# EAGLE board issue24827_brenner57e (EAGLE 4.15)
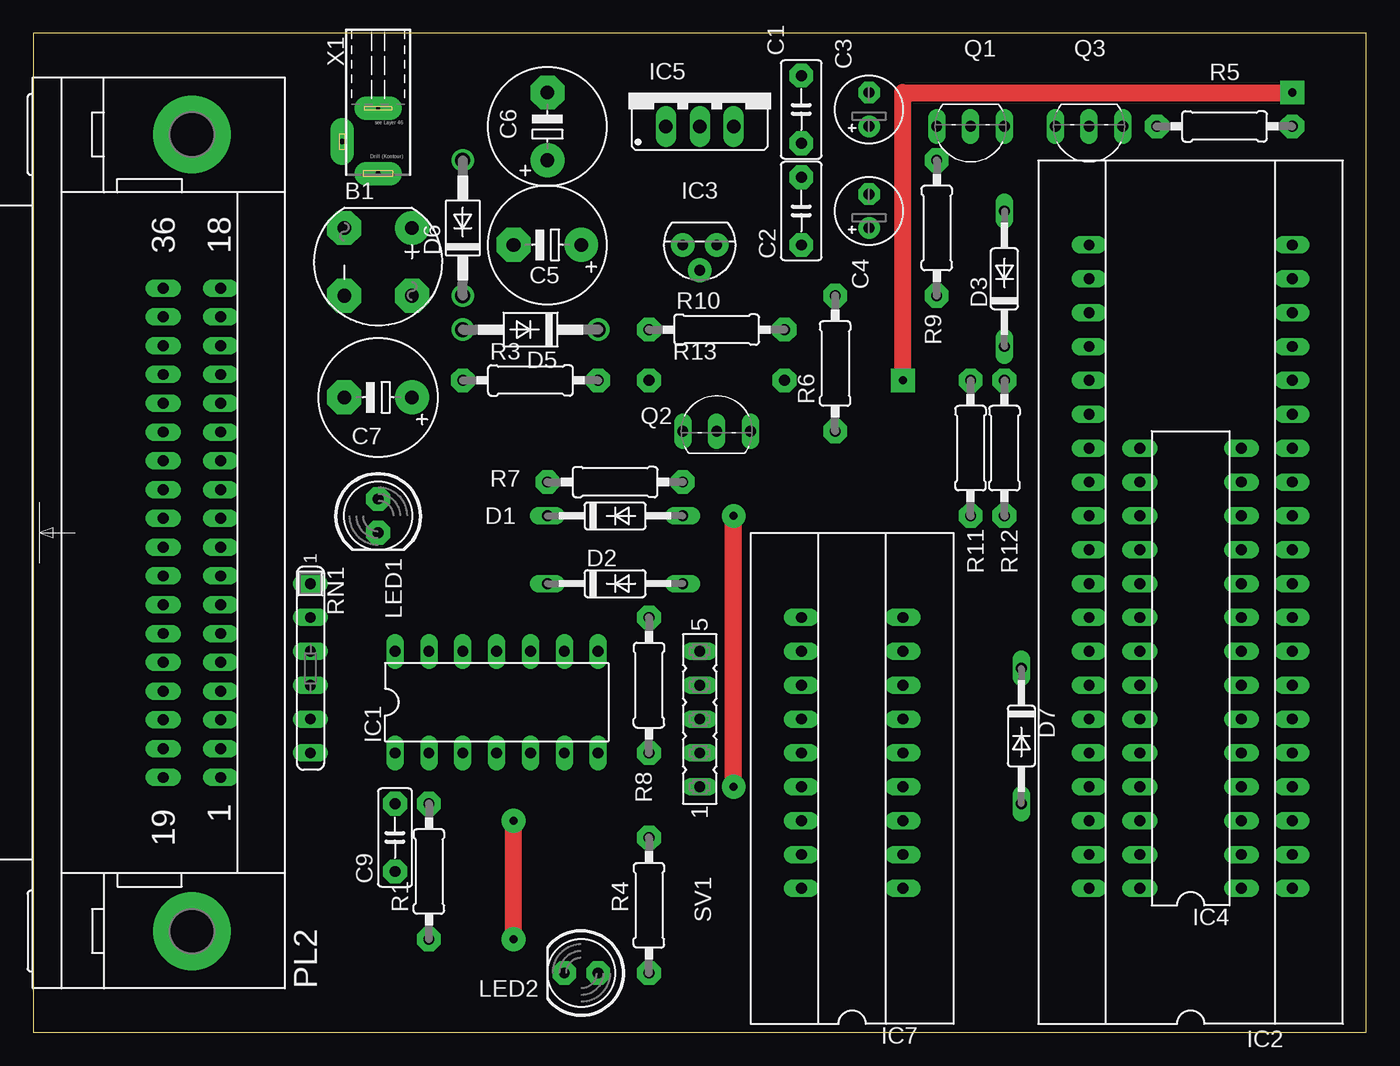
[diagram p0: board, top side]
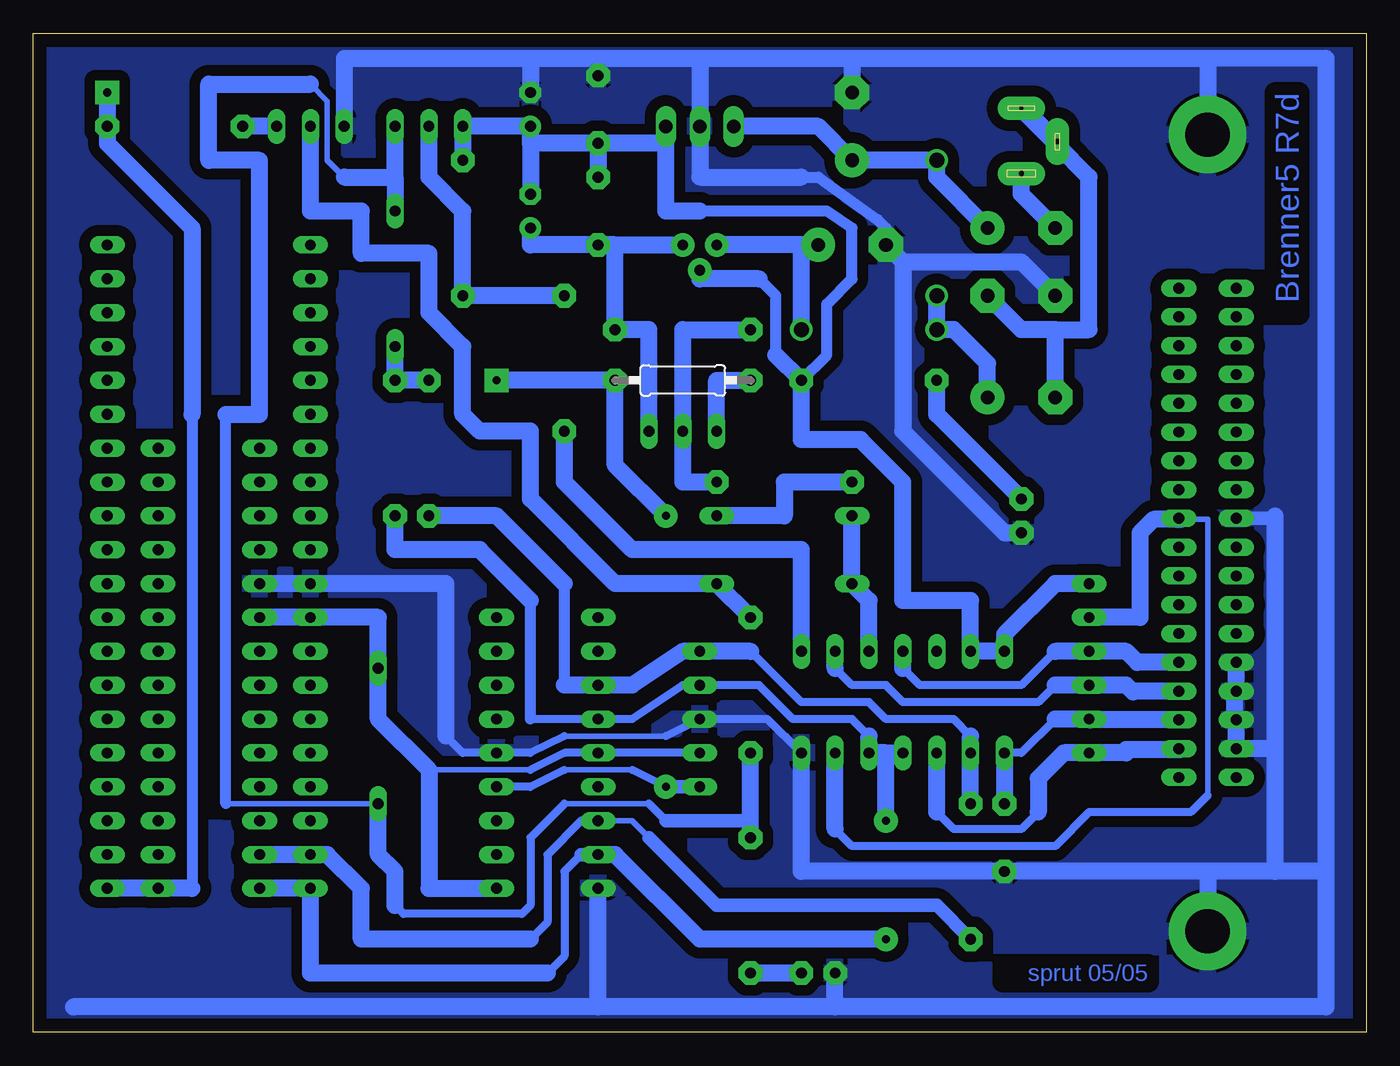
[diagram p1: board, bottom side, seen from below]

Size 100 x 74.92 mm. Coordinates in mm from the lower left corner, seen from the top.
Outline: 0,0 100,0 100,74.92 0,74.92 0,0
Copper layers (1*16): Top 0.035mm / dielectric 1.5mm / Bottom 0.035mm
Design rules "leiterplatte mit löchern": minimum track width 10mil, minimum drill 8mil, track to track 8mil, track to pad 8mil, pad to pad 8mil, via to via 8mil, smd to smd 8mil, copper to edge 40mil, drill to drill 8mil, minimum pad ring 10mil, minimum via ring 10mil, stop-mask expansion 4mil, vias tented up to drill 0mil, thermal gap 10mil
Net classes: 1 GND: width 1.016 mm

## Footprints (pad centres in the part's own frame; a part is rotated, then mirrored left to right if it is on the bottom)
RB1A = drill 1.016 pad 2.54 round: + -2.54,2.54 | drill 1.016 pad 2.54 octagon: - 2.54,-2.54; AC1 2.54,2.54; AC2 -2.54,-2.54
C050-030X075 = drill 0.813 pad 1.778 octagon: 1 -2.54,0; 2 2.54,0
E2,5-5 = drill 0.813 pad 1.6 round: + -1.27,0 | drill 0.813 pad 1.6 octagon: - 1.27,0
E5-8,5 = drill 1.016 pad 2.54 round: + -2.54,0 | drill 1.016 pad 2.54 octagon: - 2.54,0
C050-025X075 = drill 0.813 pad 1.778 octagon: 1 -2.54,0; 2 2.54,0
DO35-10 = drill 0.813 long: A 5.08,0; C -5.08,0
DO41-10 = drill 1.118 round: A 5.08,0; C -5.08,0
DIL14 = drill 0.813 long: 1 -7.62,-3.81; 2 -5.08,-3.81; 3 -2.54,-3.81; 4 0,-3.81; 5 2.54,-3.81; 6 5.08,-3.81; 7 7.62,-3.81; 8 7.62,3.81; 9 5.08,3.81; 10 2.54,3.81; 11 0,3.81; 12 -2.54,3.81; 13 -5.08,3.81; 14 -7.62,3.81
TEXTOOL40 = drill 0.813 long: 1 -24.13,-7.62; 2 -21.59,-7.62; 3 -19.05,-7.62; 4 -16.51,-7.62; 5 -13.97,-7.62; 6 -11.43,-7.62; 7 -8.89,-7.62; 8 -6.35,-7.62; 9 -3.81,-7.62; 10 -1.27,-7.62; 11 1.27,-7.62; 12 3.81,-7.62; 13 6.35,-7.62; 14 8.89,-7.62; 15 11.43,-7.62; 16 13.97,-7.62; 17 16.51,-7.62; 18 19.05,-7.62; 19 21.59,-7.62; 20 24.13,-7.62; 21 24.13,7.62; 22 21.59,7.62; 23 19.05,7.62; 24 16.51,7.62; 25 13.97,7.62; 26 11.43,7.62; 27 8.89,7.62; 28 6.35,7.62; 29 3.81,7.62; 30 1.27,7.62; 31 -1.27,7.62; 32 -3.81,7.62; 33 -6.35,7.62; 34 -8.89,7.62; 35 -11.43,7.62; 36 -13.97,7.62; 37 -16.51,7.62; 38 -19.05,7.62; 39 -21.59,7.62; 40 -24.13,7.62
TO92 = drill 0.813 pad 1.778 round: 1 -1.27,0; 2 0,1.905; 3 1.27,0
DIL28-3 = drill 0.813 long: 1 -16.51,-3.81; 2 -13.97,-3.81; 3 -11.43,-3.81; 4 -8.89,-3.81; 5 -6.35,-3.81; 6 -3.81,-3.81; 7 -1.27,-3.81; 8 1.27,-3.81; 9 3.81,-3.81; 10 6.35,-3.81; 11 8.89,-3.81; 12 11.43,-3.81; 13 13.97,-3.81; 14 16.51,-3.81; 15 16.51,3.81; 16 13.97,3.81; 17 11.43,3.81; 18 8.89,3.81; 19 6.35,3.81; 20 3.81,3.81; 21 1.27,3.81; 22 -1.27,3.81; 23 -3.81,3.81; 24 -6.35,3.81; 25 -8.89,3.81; 26 -11.43,3.81; 27 -13.97,3.81; 28 -16.51,3.81
78XXS = drill 1.016 long: GND 0,-2.54; IN -2.54,-2.54; OUT 2.54,-2.54
TEXTOOL18 = drill 0.813 long: 1 -10.16,-3.81; 2 -7.62,-3.81; 3 -5.08,-3.81; 4 -2.54,-3.81; 5 0,-3.81; 6 2.54,-3.81; 7 5.08,-3.81; 8 7.62,-3.81; 9 10.16,-3.81; 10 10.16,3.81; 11 7.62,3.81; 12 5.08,3.81; 13 2.54,3.81; 14 0,3.81; 15 -2.54,3.81; 16 -5.08,3.81; 17 -7.62,3.81; 18 -10.16,3.81
LED5MM = drill 0.813 pad 1.778 octagon: A -1.27,0; K 1.27,0
36HP = drill 0.813 long: 1 -18.352,-2.159; 2 -16.192,-2.159; 3 -14.034,-2.159; 4 -11.874,-2.159; 5 -9.716,-2.159; 6 -7.556,-2.159; 7 -5.397,-2.159; 8 -3.239,-2.159; 9 -1.079,-2.159; 10 1.079,-2.159; 11 3.239,-2.159; 12 5.397,-2.159; 13 7.556,-2.159; 14 9.716,-2.159; 15 11.874,-2.159; 16 14.034,-2.159; 17 16.192,-2.159; 18 18.352,-2.159; 19 -18.352,2.159; 20 -16.192,2.159; 21 -14.034,2.159; 22 -11.874,2.159; 23 -9.716,2.159; 24 -7.556,2.159; 25 -5.397,2.159; 26 -3.239,2.159; 27 -1.079,2.159; 28 1.079,2.159; 29 3.239,2.159; 30 5.397,2.159; 31 7.556,2.159; 32 9.716,2.159; 33 11.874,2.159; 34 14.034,2.159; 35 16.192,2.159; 36 18.352,2.159 | drill 3.302 pad 5.842 round: G -29.87,0; G1 29.87,0
TO92-EBC = drill 0.813 long: B 0,-1.27; C -2.54,-1.27; E 2.54,-1.27
0207/10 = drill 0.813 pad 1.778 octagon: 1 -5.08,0; 2 5.08,0
SIL6 = drill 0.813 long: 1 -6.35,0; 2 -3.81,0; 3 -1.27,0; 4 1.27,0; 5 3.81,0; 6 6.35,0
FE05-1 = drill 0.813 long: 1 -5.08,0; 2 -2.54,0; 3 0,0; 4 2.54,0; 5 5.08,0
733989-5 = drill 0.4 pad 1.778 long: 1 0,5.82; 3 2.7,3.42 | drill 0.3 pad 1.778 long: 2 0,0.92

## Placement (x,y rotation side)
B1  B80C...  [RB1A]  25.87,57.78 270 top
C1  100nF  [C050-030X075]  57.62,69.21 90 top
C2  100nF  [C050-030X075]  57.62,61.59 90 top
C3  2,2µF 25V  [E2,5-5]  62.7,69.21 90 top
C4  2,2µF 25V  [E2,5-5]  62.7,61.59 90 top
C5  22µF 35V  [E5-8,5]  38.57,59.05 180 top
C6  100µF 35V  [E5-8,5]  38.57,67.94 90 top
C7  100µF 35V  [E5-8,5]  25.87,47.62 180 top
C9  1nF  [C050-025X075]  27.14,14.6 90 top
D1  1N4148  [DO35-10]  43.65,38.73 0 top
D2  BAT43  [DO35-10]  43.65,33.65 0 top
D3  1N4148  [DO35-10]  72.86,56.51 90 top
D5  1N4004  [DO41-10]  37.3,52.7 180 top
D6  1N4004  [DO41-10]  32.22,60.32 90 top
D7  BAT43  [DO35-10]  74.13,22.22 270 top
IC1  7407N  [DIL14]  34.76,24.76 0 top
IC2  40-pin  [TEXTOOL40]  86.83,34.92 90 top
IC3  7808L  [TO92]  50,59.05 180 top
IC4  28-pin  [DIL28-3]  86.83,27.3 90 top
IC5  7805  [78XXS]  50,70.48 0 top
IC7  18-pin  [TEXTOOL18]  61.43,20.95 90 top
LED1  grün  [LED5MM]  25.87,38.73 270 top
LED2  gelb  [LED5MM]  41.11,4.44 180 top
PL2  Druckerport  [36HP]  11.9,37.46 90 top
Q1  BC328-25  [TO92-EBC]  70.32,66.67 180 top
Q2  BC328-25  [TO92-EBC]  51.27,46.35 0 top
Q3  BC338-25  [TO92-EBC]  79.21,66.67 180 top
R1  3k3  [0207/10]  29.68,12.06 90 top
R3  1k  [0207/10]  37.3,48.89 0 top
R4  1k  [0207/10]  46.19,9.52 90 top
R5  100  [0207/10]  89.37,67.94 0 top
R6  10k  [0207/10]  60.16,50.16 90 top
R7  10k  [0207/10]  43.65,41.27 0 top
R8  10k  [0207/10]  46.19,26.03 270 top
R9  10k  [0207/10]  67.78,60.32 90 top
R10  10k  [0207/10]  51.27,52.7 0 top
R11  220  [0207/10]  70.32,43.81 90 top
R12  1k2  [0207/10]  72.86,43.81 90 top
R13  100  [0207/10]  51.27,48.89 0 bottom
RN1  SIL6-5 1k2  [SIL6]  20.79,27.3 270 top
SV1  ICSP  [FE05-1]  50,23.49 90 top
X1  9VAC  [733989-5]  25.87,70.23 180 top

## Library data of the parts
B1 = rectifier
C1-C7 C9 R1 R3-R13 = rcl
D1 D3 D5 D6 = diode
D2 D7 IC2 IC7 = sprut
IC1 = 74xx-eu
IC3 = linear
IC4 = ic-package
IC5 = v-reg
LED1 LED2 = led
PL2 = con-amp-champ
Q1 Q2 = transistor-pnp
Q3 = transistor-npn
RN1 = resistor-sil
SV1 = con-lsta
X1 = con-conrad

## Nets
5VGESCH: D3.A D7.A Q1.C R4.2 R8.2
13V: C2.1 C4.+ IC3.1 Q2.E R10.2
DATA_IN: IC1.3 PL2.2 RN1.6
DATA_OUT: IC1.6 PL2.10 RN1.2
GND [GND]: B1.- C1.2 C3.- C5.- C6.- C9.1 IC1.7 IC2.31 IC4.19 IC5.GND IC7.5 IC7.18 LED1.K LED2.K PL2.20 PL2.21 PL2.22 PL2.23 PL2.28 PL2.G PL2.G1 Q3.E SV1.3
ICSP_CLK: IC1.2 IC7.12 R1.2 R11.1 SV1.5
ICSP_DATA: IC1.4 IC1.5 IC2.40 IC4.28 IC7.13 IC7.17 R12.1 SV1.4
MCLR: IC2.1 IC4.1 IC7.4 R5.2 R13.1 SV1.1
N$1: IC1.9 PL2.4 RN1.4
N$2: IC1.11 PL2.5 RN1.3
N$3: C9.2 IC1.1 PL2.3 RN1.5
N$4: D3.C R11.2 R12.2
N$5: IC2.39 IC4.27 IC7.16 R1.1
N$6: IC1.8 R6.1
N$7: B1.+ C6.+ D6.A IC5.IN
N$8: Q2.C R13.2
N$9: B1.AC1 C7.- X1.2 X1.3
N$10: C5.+ D5.C IC3.3
N$11: C7.+ D5.A D6.C
N$12: Q3.C R5.1
N$13: B1.AC2 X1.1
N$14: D1.C D2.C IC1.10
N$15: LED1.A R3.1
N$16: LED2.A R4.1
N$17: Q1.B R6.2 R9.1
N$18: D1.A R7.1
N$19: Q2.B R7.2 R10.1
N$21: D2.A Q3.B R8.1
VCC [GND]: C1.1 C2.2 C3.+ C4.- IC1.13 IC1.14 IC3.2 IC5.OUT Q1.E R3.2 R9.2 RN1.1
VDD: D7.C IC2.32 IC4.20 IC7.1 IC7.14 SV1.2

## Tracks (layer width: path | path; a pad name or v marks a point on that pad's centre or on a via)
5VGESCH
  Bottom 0.406: 53.81,17.14 60.16,17.14 | 76.67,64.13 77.94,65.4 77.94,69.84 79.21,71.12 | D7.A 85.56,17.14
  Bottom 0.61: 72.86,9.52 72.22,8.88 63.34,8.88 62.7,9.52 62.7,14.6 60.16,17.14 | R4.2 46.19,15.87 | 52.54,15.87 53.81,17.14
  Bottom 0.813: 85.56,17.14 85.56,46.35
  Bottom 1.016: 46.19,15.87 52.54,15.87
  Bottom 1.27: R4.2 R8.2 | 72.86,9.52 72.86,12.06 74.13,13.33 D7.A | 72.86,64.13 Q1.C | 72.86,64.13 D3.A | 76.67,64.13 72.86,64.13 | 79.21,71.12 86.83,71.12 86.83,65.4 83.02,65.4 83.02,46.35 85.56,46.35
13V
  Bottom 1.27: 56.35,59.05 IC3.1 | 56.35,59.05 C2.1 62.7,59.05 C4.+ | 56.35,59.05 R10.2 53.81,52.7 Q2.E
DATA_IN
  Bottom 0.406: 18,20.95 17.87,21.08 17.74,21.2
  Bottom 0.61: 24.6,16.5 25.87,15.23 30.95,15.23 32.22,16.5 | 18,21.2 17.87,21.08 | 13.93,21.2 14,21.27 PL2.2
  Bottom 1.27: 18,20.95 RN1.6 22.7,20.95 24.6,19.04 24.6,16.5 | 32.22,16.5 IC1.3 | 13.93,21.2 18,21.2
DATA_OUT
  Bottom 0.406: 11.9,17.77 11.9,38.48 13.93,38.48
  Bottom 0.61: 11.9,17.77 13.17,16.5 20.79,16.5 23.33,13.96 38.57,13.96 39.84,15.23
  Bottom 1.27: 39.84,15.23 IC1.6 | RN1.2 16.98,31.11 16.98,37.46 15.96,38.48 14.19,38.48 14.12,38.54 PL2.10 14,38.54 13.93,38.48
GND
  Bottom 0.406: 52.54,22.22 60.16,22.22 | 6.82,38.73 7.01,38.54
  Bottom 0.61: IC1.7 44.92,23.49 SV1.3 52.54,22.22 | 60.16,22.22 62.7,20.95 IC7.5 67.78,20.95 69.05,22.22 | PL2.28 9.55,38.54 9.36,38.73 9.17,38.54 | 9.87,25.52 9.81,25.59 | 9.81,25.59 PL2.22 | 9.81,25.59 9.74,25.65 | 9.87,23.49 9.81,23.43 PL2.21 | 9.81,21.27 9.87,21.2 | PL2.20 9.81,21.27 | 9.81,21.27 9.74,21.33 | 6.82,21.2 6.88,21.27 | 3.01,73.02 3.04,73.05
  Bottom 0.813: C5.- 36.03,60.32 36.66,60.96 41.11,64.13 42.38,64.13
  Bottom 1.016: 7.01,38.54 9.17,38.54
  Bottom 1.27: 69.05,22.22 69.05,33.65 IC2.31 IC4.19 | 6.82,12.06 11.9,12.06 | 11.9,12.06 C9.1 42.38,12.06 IC1.7 | 6.82,12.06 6.82,21.2 6.82,38.73 | 39.84,1.9 3.01,1.9 3.01,12.06 | 39.84,1.9 57.62,1.9 | 57.62,1.9 96.99,1.9 | 3.01,12.06 3.01,73.02 | 3.01,12.06 6.82,12.06 | 57.62,1.9 IC7.18 | 39.84,1.9 LED2.K | 11.9,12.06 PL2.G | 9.74,25.65 PL2.23 | 9.87,23.49 9.87,25.52 | 9.74,21.33 PL2.21 | 6.88,21.27 PL2.20 | 38.57,73.02 C6.- | 38.57,73.02 50,73.02 | 50,73.02 IC5.GND 50,64.13 42.38,64.13 | B1.- 25.87,57.78 34.76,57.78 | C5.- 34.76,57.78 | 3.04,73.05 11.9,73.02 | 11.9,73.02 PL2.G1 | 57.62,73.02 C1.2 | 62.7,73.02 C3.- | 57.62,73.02 62.7,73.02 | 50,73.02 57.62,73.02 | Q3.E 76.67,73.02 62.7,73.02 | 11.9,73.02 38.57,73.02 | LED1.K 27.14,37.46 34.76,45.08 34.76,57.78
  pour Bottom (isolate 0.813): -0.8,-0.64 100.8,-0.64 100.8,75.56 -0.8,75.56
ICSP_CLK
  Bottom 0.61: 46.19,28.57 42.38,24.76 37.3,24.76 36.03,23.49 30.95,23.49 29.68,22.22
  Bottom 0.813: 60.16,26.03 60.16,33.65
  Bottom 1.27: 46.19,28.57 SV1.5 51.27,28.57 55.08,26.03 IC7.12 60.16,26.03 | 29.68,22.22 IC1.2 R1.2 | 60.16,33.65 65.24,38.73 R11.1
ICSP_DATA  (via drill 0.61 pad 1.78)
  Top 1.27: v36.03,6.98 v36.03,15.87
  Bottom 0.61: 37.3,22.22 38.57,23.49 43.02,23.49 45.55,26.03 SV1.4 51.27,26.03 55.08,23.49 IC7.13 62.7,23.49 | 58.89,13.33 60.16,12.06 60.16,5.71 61.43,4.44
  Bottom 0.813: 62.7,23.49 62.7,32.38
  Bottom 1.016: IC7.17 58.89,13.33
  Bottom 1.27: 36.03,20.95 IC1.4 | 36.03,20.95 IC1.5 37.3,22.22 | 62.7,32.38 66.51,36.19 72.86,36.19 R12.1 | IC4.28 IC2.40 79.21,4.44 61.43,4.44 | IC7.17 56.35,13.33 50,6.98 v36.03,6.98 | v36.03,15.87 36.03,20.95
MCLR  (via drill 0.61 pad 1.78)
  Top 1.27: v52.54,18.41 v52.54,38.73 | v65.24,48.89 65.24,70.48 v94.45,70.48
  Bottom 0.406: 55.08,19.68 60.16,19.68
  Bottom 0.61: v52.54,18.41 55.08,19.68 | 60.16,19.68 62.7,18.41 IC7.4
  Bottom 0.813: 88.1,46.35 88.1,10.79
  Bottom 1.016: SV1.1 v52.54,18.41
  Bottom 1.27: IC2.1 IC4.1 88.1,10.79 | 88.1,46.35 88.1,60.32 94.45,66.67 R5.2 v94.45,70.48 | v52.54,38.73 56.35,42.54 R13.1 v65.24,48.89
N$1
  Bottom 0.61: 23.33,26.03 24.6,24.76 34.76,24.76 36.03,26.03 38.57,26.03 39.84,27.3 | 17.42,25.59 17.49,25.52 | PL2.4 14,25.59 13.93,25.52
  Bottom 1.27: 17.49,25.52 18,26.03 RN1.4 23.33,26.03 | 39.84,27.3 IC1.9 | 14,25.59 17.42,25.59
N$2
  Bottom 0.61: 23.33,28.57 25.87,26.03 33.49,26.03 34.76,27.3 | 17.17,27.74 17.23,27.81 | PL2.5 14,27.74 13.93,27.81
  Bottom 1.27: 17.23,27.81 18,28.57 RN1.3 23.33,28.57 | 34.76,27.3 IC1.11 | 14,27.74 17.17,27.74
N$3
  Bottom 0.61: 23.33,23.49 25.87,20.95 IC1.1 | 20.73,23.43 RN1.5 | PL2.3 14,23.43 13.93,23.49
  Bottom 1.27: RN1.5 23.33,23.49 | IC1.1 C9.2 | 14,23.43 20.73,23.43
N$4
  Bottom 1.27: R11.2 R12.2 D3.C
N$5
  Bottom 0.406: 53.81,14.6 55.08,15.87 IC7.16 58.89,15.87
  Bottom 0.61: 58.89,15.87 61.43,13.33 61.43,8.25 62.7,6.98
  Bottom 1.016: R1.1 32.22,9.52 48.73,9.52 53.81,14.6
  Bottom 1.27: IC4.27 IC2.39 77.94,13.33 75.4,10.79 75.4,6.98 62.7,6.98
N$6
  Bottom 1.27: R6.1 60.16,41.27 55.08,36.19 42.38,36.19 IC1.8
N$7
  Bottom 1.27: IC5.IN 41.11,67.94 C6.+ D6.A 32.22,64.13 B1.+
N$8
  Bottom 1.27: Q2.C 48.73,48.89 R13.2
N$9
  Bottom 0.61: X1.2 25.97,69.31 25.87,69.21 | 25.73,69.35 23.33,66.67 | 23.17,66.51 X1.3
  Bottom 1.27: 23.33,52.7 25.87,52.7 B1.AC1 | C7.- 23.33,52.7 | X1.3 25.73,69.35 | 23.33,66.67 25.87,69.21 | 23.17,66.51 20.79,64.13 20.79,52.7 23.33,52.7
N$10
  Bottom 1.27: D5.C 42.38,59.05 C5.+ IC3.3
N$11
  Bottom 1.27: D6.C D5.A 30.95,52.7 28.41,50.16 C7.+
N$12
  Bottom 1.27: Q3.C R5.1
N$13
  Bottom 1.27: B1.AC2 25.87,62.86 X1.1
N$14
  Bottom 1.27: IC1.10 37.3,32.38 D2.C D1.C
N$15
  Bottom 1.27: LED1.A 32.22,46.35 R3.1
N$16
  Bottom 1.27: LED2.A R4.1
N$17
  Bottom 1.27: Q1.B 70.32,64.13 67.78,61.59 R9.1 R6.2
N$18
  Bottom 1.27: R7.1 43.65,41.27 43.65,38.73 D1.A
N$19
  Bottom 1.27: R10.1 51.27,52.7 Q2.B 51.27,41.27 R7.2
N$21
  Bottom 1.27: Q3.B 79.21,61.59 75.4,61.59 75.4,58.42 70.32,58.42 70.32,53.97 67.78,51.43 67.78,46.35 66.51,45.08 62.7,45.08 62.7,40 56.35,33.65 D2.A R8.1
VCC
  Bottom 0.813: 50,61.59 40.48,61.59 38.57,60.32 38.57,56.51 40.48,54.61 40.48,50.8 R3.2 | 45.55,56.51 44.28,55.24 44.28,50.8
  Bottom 1.27: IC1.14 IC1.13 | IC1.14 27.14,29.84 23.33,33.65 RN1.1 | IC1.14 IC1.13 | IC1.13 29.68,32.38 34.76,32.38 34.76,41.27 37.94,44.45 42.38,44.45 R3.2 44.28,50.8 | 50,61.59 52.54,61.59 52.54,66.67 | 52.54,66.67 IC5.OUT | C1.1 C2.2 | 52.54,66.67 C1.1 | C1.1 62.7,66.67 | 62.7,66.67 C3.+ Q1.E R9.2 | 62.7,66.67 C4.- | 45.55,56.51 50,56.51 IC3.2
VDD
  Bottom 0.406: 62.7,19.68 70.32,19.68
  Bottom 0.61: 62.7,19.68 60.16,20.95 IC7.14 SV1.2
  Bottom 1.27: IC4.20 IC2.32 74.13,31.11 D7.C 74.13,23.49 70.32,19.68 70.32,10.79 IC7.1

## Text on the board
Bottom: Brenner5 R7d | sprut 05/05